# EAGLE board n64rgb2moutfilter_nutzen (EAGLE 9.5.2)
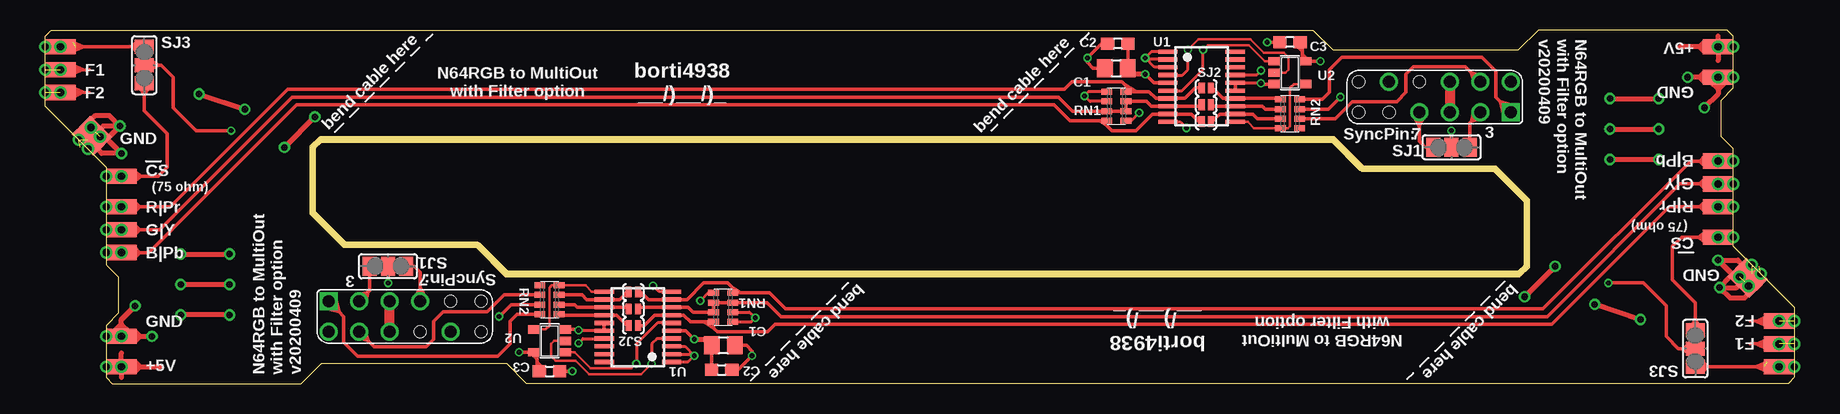
[diagram p0: board, top side]
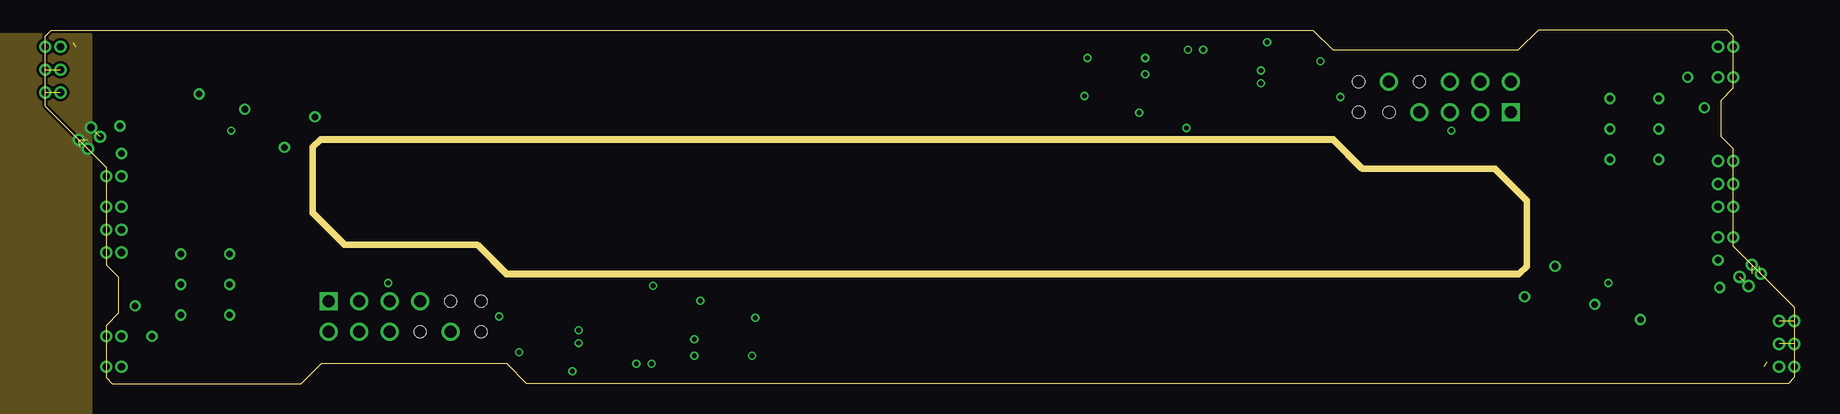
[diagram p1: board, inner layer Route2]
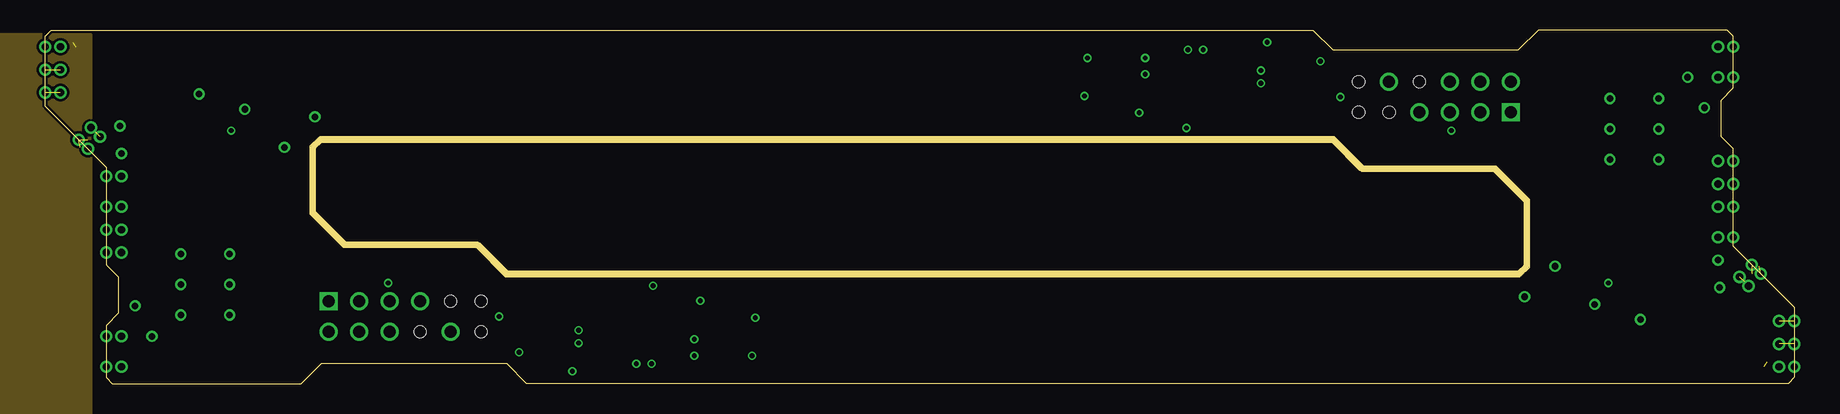
[diagram p2: board, inner layer Route15]
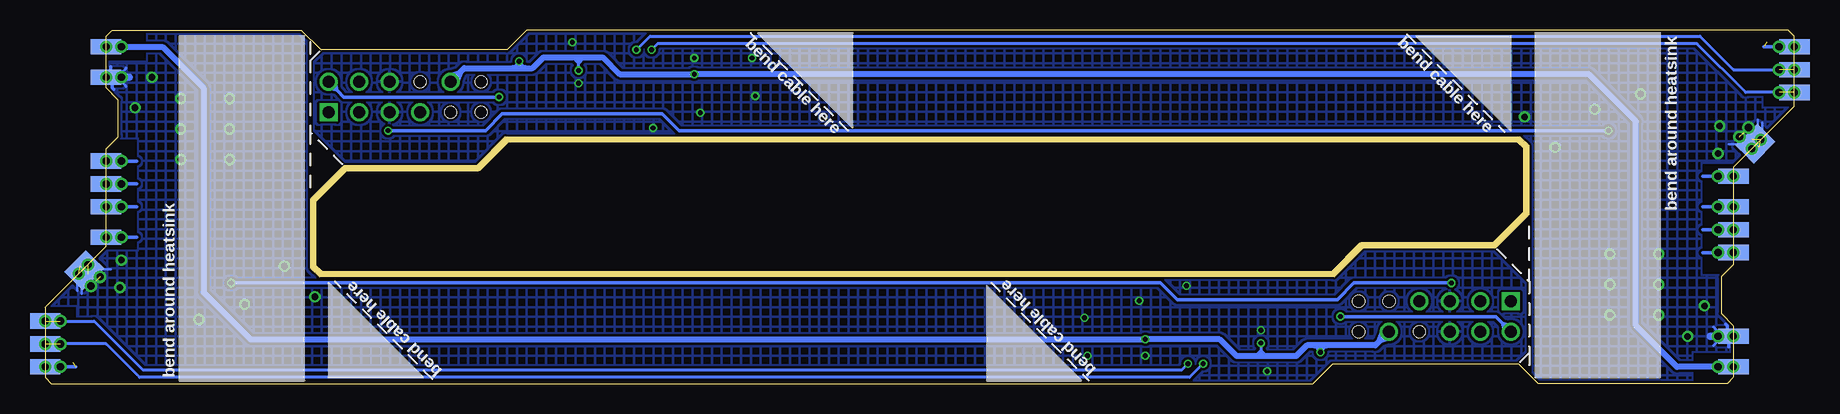
[diagram p3: board, bottom side, seen from below]

Size 145.8 x 29.46 mm. Coordinates in mm from the lower left corner, seen from the top.
Outline: 0,23.11 5.08,18.03 5.08,9.91 6.1,8.89 6.1,5.84 5.08,4.83 5.08,0.51 5.59,0 21.34,0 22.99,1.65 38.48,1.65 40.13,0 145.29,0 145.8,0.51 145.8,6.35 140.72,11.43 140.72,19.56 139.7,20.57 139.7,23.62 140.72,24.64 140.72,28.96 140.21,29.46 124.46,29.46 122.81,27.81 107.31,27.81 105.66,29.46 0.51,29.46 0,28.96 0,23.11
Outline: 22.1,14.1 22.1,19.81 22.86,20.57 107.44,20.57 109.86,18.16 120.9,18.16 123.7,15.37 123.7,9.65 122.94,8.89 38.35,8.89 35.94,11.3 24.89,11.3 22.1,14.1
Copper layers (1*16): Top 0.018mm / dielectric 1.55mm / Bottom 0.018mm
Design rules "fpc": minimum track width 0.1mm, minimum drill 0.2mm, track to track 0.2mm, track to pad 0.2mm, pad to pad 0.2mm, via to via 0.2mm, smd to smd 0mil, copper to edge 0.2mm, drill to drill 0.2mm, minimum pad ring 0.125mm, minimum via ring 0.1mm, stop-mask expansion 2mil, vias tented up to drill 1mm, thermal gap 0.2mm
bRestrict: area 5.1,-0.3 to 8.4,2.5; area 5.1,9.1 to 7.6,18.3; area 0,23.1 to 2.5,32.3; area 137.4,26.9 to 140.7,29.7; area 138.2,11.2 to 140.7,20.3; area 143.3,-2.8 to 145.8,6.4; 10 lines
Milling: 12 lines

## Footprints (pad centres in the part's own frame; a part is rotated, then mirrored left to right if it is on the bottom)
SMD1,27-2,54 = smd 1.27 x 2.54: 1 0,0
C0805 = smd 1.3 x 1.5: 1 -0.95,0; 2 0.95,0
C0603 = smd 1.1 x 1: 1 -0.85,0; 2 0.85,0
SNES_MULTIAV_RGBSY = drill 1 square: 1 6.35,-1.27 | drill 1: 2 6.35,1.27; 3 3.81,-1.27; 4 3.81,1.27; 5 1.27,-1.27; 6 1.27,1.27; 7 -1.27,-1.27; 10 -3.81,1.27 | hole 1: -3.81,-1.27; -6.35,-1.27; -6.35,1.27; -1.27,1.27
CTS742C083 = smd 0.5 x 0.9: 1 -1.2,-0.8; 2 -0.4,-0.8; 3 0.4,-0.8; 4 1.2,-0.8; 5 1.2,0.8; 6 0.4,0.8; 7 -0.4,0.8; 8 -1.2,0.8
SJ_2 = smd 1.168 x 1.6: 1 -1.524,0; 2 0,0; 3 1.524,0
SJ_SMALL = smd 0.508 x 0.889: 1 -0.381,0; 2 0.381,0
THS7368 = smd 1.6 x 0.35: 1 -2.8,2.895; 2 -2.8,2.245; 3 -2.8,1.595; 4 -2.8,0.945; 5 -2.8,0.295; 6 -2.8,-0.355; 7 -2.8,-1.005; 8 -2.8,-1.655; 9 -2.8,-2.305; 10 -2.8,-2.955; 11 2.8,-2.955; 12 2.8,-2.305; 13 2.8,-1.655; 14 2.8,-1.005; 15 2.8,-0.355; 16 2.8,0.295; 17 2.8,0.945; 18 2.8,1.595; 19 2.8,2.245; 20 2.8,2.895
SOT23-5 = smd 0.69 x 0.99: 1 -0.95,-1.29; 2 0,-1.29; 3 0.95,-1.29; 4 0.95,1.3; 5 -0.95,1.3

## Placement (x,y rotation side)
B/PB  [SMD1,27-2,54]  6.35,10.92 90 top
B/PB1  [SMD1,27-2,54]  5.08,10.92 90 bottom
B/PB2  [SMD1,27-2,54]  139.45,18.54 270 top
B/PB3  [SMD1,27-2,54]  140.72,18.54 270 bottom
C1  22u  [C0805]  89.28,26.29 0 top
C2  0.1u  [C0603]  89.41,28.32 180 top
C3  0.1u  [C0603]  103.76,28.45 180 top
C4  22u  [C0805]  56.52,3.17 180 top
C5  0.1u  [C0603]  56.39,1.14 0 top
C6  0.1u  [C0603]  42.04,1.02 0 top
CS75#  [SMD1,27-2,54]  6.35,17.27 90 top
CS75#1  [SMD1,27-2,54]  5.08,17.27 90 bottom
CS75#2  [SMD1,27-2,54]  139.45,12.19 270 top
CS75#3  [SMD1,27-2,54]  140.72,12.19 270 bottom
CS#  [SMD1,27-2,54]  0,28.07 90 bottom
CS#1  [SMD1,27-2,54]  1.27,28.07 90 top
CS#2  [SMD1,27-2,54]  145.8,1.4 270 bottom
CS#3  [SMD1,27-2,54]  144.53,1.4 270 top
E$1  [SNES_MULTIAV_RGBSY]  115.82,23.88 0 top
E$2  [SNES_MULTIAV_RGBSY]  29.97,5.59 180 top
F1  [SMD1,27-2,54]  0,26.16 90 bottom
F2  [SMD1,27-2,54]  0,24.26 90 bottom
F3  [SMD1,27-2,54]  1.27,24.26 90 top
F4  [SMD1,27-2,54]  1.27,26.16 90 top
F5  [SMD1,27-2,54]  145.8,3.3 270 bottom
F6  [SMD1,27-2,54]  145.8,5.21 270 bottom
F7  [SMD1,27-2,54]  144.53,5.21 270 top
F8  [SMD1,27-2,54]  144.53,3.3 270 top
G/Y  [SMD1,27-2,54]  6.35,12.83 90 top
G/Y1  [SMD1,27-2,54]  5.08,12.83 90 bottom
G/Y2  [SMD1,27-2,54]  139.45,16.64 270 top
G/Y3  [SMD1,27-2,54]  140.72,16.64 270 bottom
P_GND1  [SMD1,27-2,54]  5.08,3.94 90 bottom
P_GND2  [SMD1,27-2,54]  6.35,3.94 90 top
P_GND3  [SMD1,27-2,54]  4.19,20.96 45 top
P_GND4  [SMD1,27-2,54]  3.56,20.32 45 top
P_GND5  [SMD1,27-2,54]  2.92,19.69 315 bottom
P_GND6  [SMD1,27-2,54]  3.56,20.32 315 bottom
P_GND7  [SMD1,27-2,54]  139.45,25.53 270 top
P_GND8  [SMD1,27-2,54]  141.6,8.51 225 top
P_GND9  [SMD1,27-2,54]  142.24,9.14 225 top
P_GND10  [SMD1,27-2,54]  140.72,25.53 270 bottom
P_GND11  [SMD1,27-2,54]  142.88,9.78 135 bottom
P_GND12  [SMD1,27-2,54]  142.24,9.14 135 bottom
P_VCC_5V  [SMD1,27-2,54]  6.35,1.4 90 top
P_VCC_5V1  [SMD1,27-2,54]  5.08,1.4 90 bottom
P_VCC_5V2  [SMD1,27-2,54]  139.45,28.07 270 top
P_VCC_5V3  [SMD1,27-2,54]  140.72,28.07 270 bottom
R/PR  [SMD1,27-2,54]  6.35,14.73 90 top
R/PR1  [SMD1,27-2,54]  5.08,14.73 90 bottom
R/PR2  [SMD1,27-2,54]  139.45,14.73 270 top
R/PR3  [SMD1,27-2,54]  140.72,14.73 270 bottom
RN1  75  [CTS742C083]  89.28,23.11 90 top
RN2  75  [CTS742C083]  103.76,22.48 270 top
RN3  75  [CTS742C083]  56.52,6.35 270 top
RN4  75  [CTS742C083]  42.04,6.99 90 top
SJ1  [SJ_2]  117.22,19.69 180 top
SJ2  [SJ_2]  28.57,9.78 0 top
SJ2B  [SJ_SMALL]  96.77,24.64 0 top
SJ2B1  [SJ_SMALL]  49.02,4.83 180 top
SJ2G  [SJ_SMALL]  96.77,23.24 0 top
SJ2G1  [SJ_SMALL]  49.02,6.22 180 top
SJ2R  [SJ_SMALL]  96.77,21.84 0 top
SJ2R1  [SJ_SMALL]  49.02,7.62 180 top
SJ3  [SJ_2]  8.26,26.54 270 top
SJ4  [SJ_2]  137.54,2.92 90 top
U1  [THS7368]  96.39,24.77 0 top
U2  [SOT23-5]  103.76,25.91 270 top
U3  [THS7368]  49.4,4.7 180 top
U4  [SOT23-5]  42.04,3.56 90 top

## Library data of the parts
B/PB B/PB1-B/PB3 CS75# CS75#1-CS75#3 CS# CS#1-CS#3 F1-F8 G/Y G/Y1-G/Y3 P_GND1-P_GND3 P_GND7 P_GND8 P_GND10 P_VCC_5V P_VCC_5V1-P_VCC_5V3 R/PR R/PR1-R/PR3 = wirepad@1
C1-C6 = rcl
E$1 E$2 U1 U3 = snes_div
P_GND4-P_GND6 P_GND9 P_GND11 P_GND12 = wirepad
RN1-RN4 = resistor-net
SJ1 SJ2 SJ2B SJ2B1 SJ2G SJ2G1 SJ2R SJ2R1 SJ3 SJ4 = jumper
U2 U4 = 74xx-little-de

## Nets
5V: C1.2 C2.1 C3.1 E$1.10 P_VCC_5V1.1 P_VCC_5V.1 U1.5 U1.17 U2.5
5V1: C4.2 C5.1 C6.1 E$2.10 P_VCC_5V2.1 P_VCC_5V3.1 U3.5 U3.17 U4.5
#CS: E$1.3 SJ1.1
#CS1: E$2.3 SJ2.1
#CS.75.I: CS75#1.1 CS75#.1 SJ3.3
#CS.75.I1: CS75#2.1 CS75#3.1 SJ4.3
#CS.I: CS#1.1 CS#.1 SJ3.1
#CS.I1: CS#2.1 CS#3.1 SJ4.1
#CS.SEL: SJ1.2 SJ3.2
#CS.SEL1: SJ2.2 SJ4.2
BLUE: B/PB1.1 B/PB.1 RN1.8 SJ2R.1 U1.9
BLUE1: B/PB2.1 B/PB3.1 RN3.8 SJ2R1.1 U3.9
BLUE.OUT: RN2.3 SJ2R.2 U1.12
BLUE.OUT1: RN4.3 SJ2R1.2 U3.12
BLUE.OUT.1: E$2.4 RN4.6
BLUE.OUT.75: E$1.4 RN2.6
BYPASS_SF: RN2.4 U1.11 U2.4
BYPASS_SF1: RN4.4 U3.11 U4.4
F1: F1.1 F4.1 U1.6 U2.1
F2: F2.1 F3.1 U1.4 U2.2
F3: F5.1 F8.1 U3.6 U4.1
F4: F6.1 F7.1 U3.4 U4.2
GND: C1.1 C2.2 C3.2 E$1.5 E$1.6 P_GND1.1 P_GND2.1 P_GND3.1 P_GND4.1 P_GND5.1 P_GND6.1 RN1.1 RN1.5 RN1.6 U1.1 U1.2 U1.3 U1.10 U1.15 U1.16 U2.3
GND1: C4.1 C5.2 C6.2 E$2.5 E$2.6 P_GND7.1 P_GND8.1 P_GND9.1 P_GND10.1 P_GND11.1 P_GND12.1 RN3.1 RN3.5 RN3.6 U3.1 U3.2 U3.3 U3.10 U3.15 U3.16 U4.3
GREEN: G/Y1.1 G/Y.1 RN1.2 RN1.3 RN1.7 SJ2G.1 U1.8
GREEN1: G/Y2.1 G/Y3.1 RN3.2 RN3.3 RN3.7 SJ2G1.1 U3.8
GREEN.OUT: RN2.2 SJ2G.2 U1.13
GREEN.OUT1: RN4.2 SJ2G1.2 U3.13
GREEN.OUT.1: E$2.2 RN4.7
GREEN.OUT.75: E$1.2 RN2.7
LUMA: E$1.7 SJ1.3
LUMA1: E$2.7 SJ2.3
RED: R/PR1.1 R/PR.1 RN1.4 SJ2B.1 U1.7
RED1: R/PR2.1 R/PR3.1 RN3.4 SJ2B1.1 U3.7
RED1.OUT: RN2.1 SJ2B.2 U1.14
RED1.OUT1: RN4.1 SJ2B1.2 U3.14
RED.OUT.1: E$2.1 RN4.8
RED.OUT.75: E$1.1 RN2.8

## Tracks (layer width: path | path; a pad name or v marks a point on that pad's centre or on a via)
5V  (via drill 0.4, 0.6)
  Top 0.254: v101.35,26.09 100.97,25.71 U1.17
  Top 0.305: C1.2 90.23,26.47 90.26,26.5 C2.1 | U1.5 92.42,25.06 v91.69,25.78 | v106.3,26.85 U2.5 104.78,27.14 104.78,27.43 | C3.1 104.78,28.28 104.78,27.69 | 104.78,27.43 104.78,27.69 | 104.78,27.69 104.27,28.19 | 104.78,27.43 105.28,26.92
  Top 0.406: P_VCC_5V.1 7.87,1.4 | 7.49,1.78 7.87,1.4 | 7.87,1.4 7.49,1.02 | 5.48,1.4 P_VCC_5V.1 | 7.87,1.4 9.53,1.4 | P_VCC_5V.1 6.35,2.54 | P_VCC_5V.1 6.35,0.51 | v91.69,25.78 90.74,25.78 C1.2
  Bottom 0.254: 101.35,26.67 101.35,27.18 | 101.35,26.67 100.84,27.18 | v101.35,26.09 101.35,26.67 | 101.35,26.67 101.85,27.18
  Bottom 0.305: 111,26.16 111.51,24.89 | 111.12,26.04 112.27,25.65 | 105.79,26.29 106.3,26.8 106.81,26.29 | v106.3,26.85 106.3,26.29
  Bottom 0.406: P_VCC_5V1.1 P_VCC_5V.1
  Bottom 0.508: P_VCC_5V.1 9.78,1.4 13.21,4.83 13.21,21.84 17.14,25.78 v91.69,25.78 97.92,25.78 99.31,27.18 100.84,27.18 101.35,27.18 101.85,27.18 104.27,27.18 105.16,26.29 105.79,26.29 106.3,26.29 106.81,26.29 110.87,26.29 111,26.16 111.12,26.04 E$1.10
  other vias: 5.08,1.4 6.35,1.4
5V1  (via drill 0.4, 0.6)
  Top 0.254: v44.45,3.37 44.83,3.75 U3.17
  Top 0.305: C4.2 55.56,3 55.54,2.97 C5.1 | U3.5 53.38,4.4 v54.1,3.68 | v39.5,2.61 U4.5 41.02,2.32 41.02,2.03 | C6.1 41.02,1.18 41.02,1.78 | 41.02,2.03 41.02,1.78 | 41.02,1.78 41.53,1.27 | 41.02,2.03 40.51,2.54
  Top 0.406: P_VCC_5V2.1 137.92,28.07 | 138.3,27.69 137.92,28.07 | 137.92,28.07 138.3,28.45 | 140.31,28.07 P_VCC_5V2.1 | 137.92,28.07 136.27,28.07 | P_VCC_5V2.1 139.45,26.92 | P_VCC_5V2.1 139.45,28.96 | v54.1,3.68 55.06,3.68 C4.2
  Bottom 0.254: 44.45,2.79 44.45,2.29 | 44.45,2.79 44.96,2.29 | v44.45,3.37 44.45,2.79 | 44.45,2.79 43.94,2.29
  Bottom 0.305: 34.8,3.3 34.29,4.57 | 34.67,3.43 33.53,3.81 | 40.01,3.17 39.5,2.67 38.99,3.17 | v39.5,2.61 39.5,3.17
  Bottom 0.406: P_VCC_5V3.1 P_VCC_5V2.1
  Bottom 0.508: P_VCC_5V2.1 136.02,28.07 132.59,24.64 132.59,7.62 128.65,3.68 v54.1,3.68 47.88,3.68 46.48,2.29 44.96,2.29 44.45,2.29 43.94,2.29 41.53,2.29 40.64,3.17 40.01,3.17 39.5,3.17 38.99,3.17 34.92,3.17 34.8,3.3 34.67,3.43 E$2.10
  other vias: 140.72,28.07 139.45,28.07
#CS
  Top 0.254: 119.89,22.1 118.87,21.84 119.13,22.86
  Top 0.305: E$1.3 118.87,21.84 118.75,21.72 SJ1.1
#CS1
  Top 0.254: 25.91,7.37 26.92,7.62 26.67,6.6
  Top 0.305: E$2.3 26.92,7.62 27.05,7.75 SJ2.1
#CS.75.I  (via drill 0.6)
  Top 0.305: CS75#1.1 CS75#.1 8,17.27 | 8,17.27 9.4,17.27 10.16,18.03 10.16,20.83 8.26,22.73 8.26,24.13 | 8,17.27 7.49,17.65 | 8,17.27 7.49,16.89 | 8.26,24.13 SJ3.3 | 8.26,24.13 8.76,24.89 | 8.26,24.13 7.75,24.89
  Bottom 0.305: CS75#1.1 7.62,17.27
  other vias: 5.08,17.27 6.35,17.27
#CS.75.I1  (via drill 0.6)
  Top 0.305: CS75#3.1 CS75#2.1 137.79,12.19 | 137.79,12.19 136.4,12.19 135.64,11.43 135.64,8.64 137.54,6.73 137.54,5.33 | 137.79,12.19 138.3,11.81 | 137.79,12.19 138.3,12.57 | 137.54,5.33 SJ4.3 | 137.54,5.33 137.03,4.57 | 137.54,5.33 138.05,4.57
  Bottom 0.305: CS75#3.1 138.18,12.19
  other vias: 140.72,12.19 139.45,12.19
#CS.I  (via drill 0.6)  (1 unrouted)
  Top 0.254: CS#1.1 3.17,28.07
  Top 0.305: 3.17,28.07 2.29,27.69 | 3.17,28.07 2.29,28.45 | 3.17,28.07 7.11,28.07 | 7.11,28.07 SJ3.1 | 7.11,28.07 7.62,28.45 | 7.11,28.07 7.62,27.69
  Bottom 0.203: -0.36,27.71 CS#.1
  Bottom 0.305: CS#.1 2.54,28.07
  other vias: 0,28.07 1.27,28.07
#CS.I1  (via drill 0.6)  (1 unrouted)
  Top 0.254: CS#3.1 142.62,1.4
  Top 0.305: 142.62,1.4 143.51,1.78 | 142.62,1.4 143.51,1.02 | 142.62,1.4 138.68,1.4 | 138.68,1.4 SJ4.1 | 138.68,1.4 138.18,1.02 | 138.68,1.4 138.18,1.78
  Bottom 0.203: 146.16,1.76 CS#2.1
  Bottom 0.305: CS#2.1 143.26,1.4
  other vias: 145.8,1.4 144.53,1.4
#CS.SEL  (via drill 0.4)
  Top 0.305: SJ1.2 v117.22,21.08 | v15.49,21.08 12.57,21.08 10.67,22.99 10.67,25.53 9.65,26.54 9.4,26.54 | 9.4,26.54 SJ3.2 | 9.4,26.54 8.76,26.16 | 9.4,26.54 8.76,26.92
  Bottom 0.305: v117.22,21.08 109.09,21.08 107.7,22.48 94.36,22.48 92.96,21.08 v15.49,21.08
#CS.SEL1  (via drill 0.4)
  Top 0.305: SJ2.2 v28.57,8.38 | v130.3,8.38 133.22,8.38 135.13,6.48 135.13,3.94 136.14,2.92 136.4,2.92 | 136.4,2.92 SJ4.2 | 136.4,2.92 137.03,3.3 | 136.4,2.92 137.03,2.54
  Bottom 0.305: v28.57,8.38 36.7,8.38 38.1,6.99 51.44,6.99 52.83,8.38 v130.3,8.38
+5V
  pour Route15 (rank 3): -22.86,29.08 -22.86,24.26 -22.1,23.5 -17.02,23.5 -16.51,22.99 -16.51,17.4 -16,16.89 -14.22,16.89 -9.14,11.81 -9.14,8.76 -9.65,8.25 -13.21,8.25 -13.72,7.75 -13.72,1.91 -13.21,1.4 -7.37,1.4 -6.86,0.89 -6.86,-2.92 -6.1,-3.68 3.81,-3.68 3.81,29.08
BLUE  (via drill 0.6)
  Top 0.254: 96.39,22.1 SJ2R.1
  Top 0.305: 7.87,10.92 B/PB.1 B/PB1.1 | 7.49,11.3 7.87,10.92 | 7.87,10.92 7.49,10.54 | 7.87,10.92 8.64,10.92 20.95,23.24 84.07,23.24 85.4,21.91 87.88,21.91 | 95.89,22.1 95.52,22.46 U1.9 92.31,22.46 90.93,21.08 88.9,21.08 88.48,21.5 | 95.89,22.1 96.39,22.1 | 87.88,21.91 RN1.8 88.48,21.5 | 87.88,21.91 88.48,21.5 | 95.89,22.1 96.39,21.59
  Bottom 0.305: B/PB1.1 7.62,10.92
  other vias: 5.08,10.92 6.35,10.92
BLUE1  (via drill 0.6)
  Top 0.254: 49.4,7.37 SJ2R1.1
  Top 0.305: 137.92,18.54 B/PB2.1 B/PB3.1 | 138.3,18.16 137.92,18.54 | 137.92,18.54 138.3,18.92 | 137.92,18.54 137.16,18.54 124.84,6.22 61.72,6.22 60.4,7.55 57.91,7.55 | 49.91,7.37 50.27,7 U3.9 53.49,7 54.86,8.38 56.9,8.38 57.31,7.96 | 49.91,7.37 49.4,7.37 | 57.91,7.55 RN3.8 57.31,7.96 | 57.91,7.55 57.31,7.96 | 49.91,7.37 49.4,7.87
  Bottom 0.305: B/PB3.1 138.18,18.54
  other vias: 140.72,18.54 139.45,18.54
BLUE.OUT
  Top 0.254: 97.16,22.1 SJ2R.2 | 97.54,22.1
  Top 0.305: 97.54,22.1 97.91,22.46 U1.12 100.67,22.46 101.05,22.08 RN2.3 | 97.16,22.1 97.54,22.1 97.16,21.59
BLUE.OUT1
  Top 0.254: 48.64,7.37 SJ2R1.2 | 48.25,7.37 48.26,7.37
  Top 0.305: 48.25,7.37 47.89,7 U3.12 45.12,7 44.74,7.38 RN4.3 | 48.64,7.37 48.26,7.37 48.64,7.87
BLUE.OUT.1
  Top 0.305: 26.92,3.56 27.43,3.05 31.75,3.05 32.38,3.68 32.38,5.21 33.15,5.97 36.83,5.97 38.25,7.38 RN4.6 | 26.92,3.56 E$2.4 | 26.92,3.56 25.78,3.94 | 26.92,3.56 26.54,4.7
BLUE.OUT.75
  Top 0.305: 118.87,25.91 118.36,26.42 114.05,26.42 113.41,25.78 113.41,24.26 112.65,23.5 108.97,23.5 107.55,22.08 RN2.6 | 118.87,25.91 E$1.4 | 118.87,25.91 120.02,25.53 | 118.87,25.91 119.25,24.77
BYPASS_SF
  Top 0.203: U1.11 100.24,21.81 100.77,21.28 RN2.4 103.58,21.28 103.76,21.46 103.76,24.64 104.08,24.96 U2.4
BYPASS_SF1
  Top 0.203: U3.11 45.56,7.65 45.03,8.18 RN4.4 42.22,8.18 42.04,8 42.04,4.83 41.72,4.51 U4.4
F1  (via drill 0.4, 0.6)  (1 unrouted)
  Top 0.203: v96.52,27.81 96.9,28.19 100.33,28.19 101.67,26.86 U2.1
  Top 0.254: F4.1 2.67,26.16 | 2.67,26.16 3.17,26.16 | 3.17,26.16 2.29,25.78 | 3.17,26.16 2.29,26.54 | U1.6 94.77,24.41 96.52,26.16 v96.52,27.81 | 3.17,26.16 3.68,26.16 | 2.67,26.16 2.54,26.04 2.54,26.29
  Bottom 0.254: v96.52,27.81 95.38,28.96 7.87,28.96 5.08,26.16 F1.1
  other vias: 0,26.16
F2  (via drill 0.4, 0.6)  (1 unrouted)
  Top 0.203: v95.25,27.81 96.14,28.7 100.46,28.7 101.6,27.56 103.25,27.56 103.63,27.18 103.63,26.16 103.38,25.91 U2.2
  Top 0.254: F3.1 2.67,24.26 | 2.67,24.26 3.17,24.26 | 3.17,24.26 2.29,24.64 | 3.17,24.26 2.41,23.88 | 3.17,24.26 3.68,24.26 | 2.67,24.26 2.54,24 | 2.67,24.26 2.54,24.38 | 94.29,25.71 U1.4 94.8,25.71 95.25,26.16 v95.25,27.81
  Bottom 0.254: v95.25,27.81 94.74,28.32 8.13,28.32 4.06,24.26 F2.1
  other vias: 0,24.26
F3  (via drill 0.4, 0.6)  (1 unrouted)
  Top 0.203: v49.28,1.65 48.9,1.27 45.47,1.27 44.13,2.61 U4.1
  Top 0.254: F8.1 143.13,3.3 | 143.13,3.3 142.62,3.3 | 142.62,3.3 143.51,3.68 | 142.62,3.3 143.51,2.92 | U3.6 51.03,5.05 49.28,3.3 v49.28,1.65 | 142.62,3.3 142.11,3.3 | 143.13,3.3 143.26,3.43 143.26,3.17
  Bottom 0.254: v49.28,1.65 50.42,0.51 137.92,0.51 140.72,3.3 F5.1
  other vias: 145.8,3.3
F4  (via drill 0.4, 0.6)  (1 unrouted)
  Top 0.203: v50.55,1.65 49.66,0.76 45.34,0.76 44.2,1.91 42.55,1.91 42.16,2.29 42.16,3.3 42.42,3.56 U4.2
  Top 0.254: F7.1 143.13,5.21 | 143.13,5.21 142.62,5.21 | 142.62,5.21 143.51,4.83 | 142.62,5.21 143.38,5.59 | 142.62,5.21 142.11,5.21 | 143.13,5.21 143.26,5.46 | 143.13,5.21 143.26,5.08 | 51.51,3.75 U3.4 51,3.75 50.55,3.3 v50.55,1.65
  Bottom 0.254: v50.55,1.65 51.05,1.14 137.67,1.14 141.73,5.21 F6.1
  other vias: 145.8,5.21
GND  (via drill 0.4, 0.55, 0.6)  (3 unrouted)
  Top 0.254: v91.69,27.14 91.82,27.01 U1.2 | U1.1 92.22,27.66 v91.69,27.14 | U1.3 92.47,26.36 v91.69,27.14 | U1.10 94.61,21.81 v95.12,21.3 | RN1.1 90.53,21.91 v91.19,22.57 | RN1.5 86.96,24.31 86.63,23.99 | 86.63,23.99 v86.61,23.97 | RN1.6 87.1,23.51 86.63,23.99 | v101.35,25.02 101.31,25.06 U1.16
  Top 0.305: P_GND2.1 P_GND1.1 | C2.2 88.05,28.32 v86.87,27.14 86.87,26.76 87.33,26.29 C1.1 | U1.16 U1.15 | U2.3 101.41,24.96 v101.35,25.02 | v101.85,28.45 C3.2
  Top 0.406: 7.87,3.94 P_GND2.1 6.35,4.95 | 7.87,3.94 v8.89,3.94 | 6.35,4.95 6.35,5.33 v7.49,6.48 | 6.35,4.95 6.99,4.32 | 6.35,4.95 5.71,4.32 | 7.49,4.32 7.87,3.94 | 7.87,3.94 7.49,3.56 | v6.22,21.46 4.83,21.46 4.57,21.21 v4.57,20.57 | 3.68,20.19 4.7,19.18 v6.35,19.18 4.95,20.57 | 3.68,20.19 P_GND6.1 4.32,20.32 v4.57,20.57 | 4.95,20.57 v4.57,20.57 | v6.22,21.46 5.33,20.57 4.95,20.57 | v6.22,21.46 5.36,22.33 4.17,22.33 3.68,21.84 3.68,20.19 | v11.3,10.79 v15.37,10.79 | v15.37,8.25 v11.3,8.25 | v15.37,5.71 v11.3,5.71 | v22.48,22.23 v19.94,19.69 | v12.83,24.13 v16.64,22.86
  Top 0.813: E$1.6 E$1.5
  Bottom 0.203: 2.67,21.72 2.67,21.21 3.05,20.83 | 3.05,20.83 P_GND6.1 | 5.46,19.94 3.94,19.94 P_GND6.1 | P_GND6.1 3.56,21.46 3.68,21.59 | 4.83,20.32 P_GND6.1 | 3.05,20.83 3.05,21.97
  Bottom 0.254: 6.73,4.7 6.35,4.32 P_GND2.1 6.35,3.56 6.73,3.17
  Bottom 0.305: P_GND2.1 5.59,3.94 | 5.59,3.94 5.59,4.83 5.71,4.95 | 5.59,3.94 5.46,3.81 5.46,3.05
  Bottom 0.406: v4.57,20.57 3.94,19.94 | P_GND5.1 3.43,19.69 v3.56,19.56
  Bottom 0.61: P_GND2.1 6.99,3.94
  other vias: 5.08,3.94 6.35,3.94 2.79,20.32 3.81,21.34
  pour Route2 (rank 2): -62.23,-9.02 3.81,-9.02 3.81,29.08 -62.23,29.08
  pour Bottom (hatched): 0,29.46 123.83,29.46 123.83,17.53 22.1,17.53 22.1,0 5.08,0 5.08,18.03 0,23.11
GND1  (via drill 0.4, 0.55, 0.6)  (3 unrouted)
  Top 0.254: v54.1,2.33 53.98,2.45 U3.2 | U3.1 53.58,1.8 v54.1,2.33 | U3.3 53.33,3.1 v54.1,2.33 | U3.10 51.18,7.65 v50.67,8.16 | RN3.1 55.27,7.55 v54.61,6.89 | RN3.5 58.84,5.15 59.16,5.48 | 59.16,5.48 v59.18,5.5 | RN3.6 58.69,5.95 59.16,5.48 | v44.45,4.45 44.49,4.4 U3.16
  Top 0.305: P_GND7.1 P_GND10.1 | C5.2 57.74,1.14 v58.93,2.33 58.93,2.71 58.46,3.17 C4.1 | U3.16 U3.15 | U4.3 44.39,4.51 v44.45,4.45 | v43.94,1.02 C6.2
  Top 0.406: 137.92,25.53 P_GND7.1 139.45,24.51 | 137.92,25.53 v136.91,25.53 | 139.45,24.51 139.45,24.13 v138.3,22.99 | 139.45,24.51 138.81,25.15 | 139.45,24.51 140.08,25.15 | 138.3,25.15 137.92,25.53 | 137.92,25.53 138.3,25.91 | v139.57,8 140.97,8 141.22,8.25 v141.22,8.89 | 142.11,9.27 141.1,10.29 v139.45,10.29 140.84,8.89 | 142.11,9.27 P_GND12.1 141.48,9.14 v141.22,8.89 | 140.84,8.89 v141.22,8.89 | v139.57,8 140.46,8.89 140.84,8.89 | v139.57,8 140.44,7.13 141.63,7.13 142.11,7.62 142.11,9.27 | v134.49,18.67 v130.43,18.67 | v130.43,21.21 v134.49,21.21 | v130.43,23.75 v134.49,23.75 | v123.32,7.24 v125.86,9.78 | v132.97,5.33 v129.16,6.6
  Top 0.813: E$2.6 E$2.5
  Bottom 0.203: 143.13,7.75 143.13,8.25 142.75,8.64 | 142.75,8.64 P_GND12.1 | 140.34,9.52 141.86,9.52 P_GND12.1 | P_GND12.1 142.24,8 142.11,7.87 | 140.97,9.14 P_GND12.1 | 142.75,8.64 142.75,7.49
  Bottom 0.254: 139.06,24.77 139.45,25.15 P_GND7.1 139.45,25.91 139.06,26.29
  Bottom 0.305: P_GND7.1 140.21,25.53 | 140.21,25.53 140.21,24.64 140.08,24.51 | 140.21,25.53 140.34,25.65 140.34,26.42
  Bottom 0.406: v141.22,8.89 141.86,9.52 | P_GND11.1 142.37,9.78 v142.24,9.91
  Bottom 0.61: P_GND7.1 138.81,25.53
  other vias: 140.72,25.53 139.45,25.53 143,9.14 141.99,8.13
  pour Bottom (hatched): 145.8,0 21.97,0 21.97,11.94 123.7,11.94 123.7,29.46 140.72,29.46 140.72,11.43 145.8,6.35
GREEN  (via drill 0.6)
  Top 0.305: 7.87,12.83 G/Y.1 G/Y1.1 | 7.49,12.45 7.87,12.83 | 7.49,13.21 7.87,12.83 | 7.87,12.83 9.53,12.83 20.57,23.88 84.45,23.88 85.62,22.71 RN1.7 RN1.2 RN1.3 91.8,23.51 92.21,23.11 U1.8 96.26,23.11 SJ2G.1
  Bottom 0.305: G/Y1.1 7.62,12.83
  other vias: 5.08,12.83 6.35,12.83
GREEN1  (via drill 0.6)
  Top 0.305: 137.92,16.64 G/Y2.1 G/Y3.1 | 138.3,17.02 137.92,16.64 | 138.3,16.26 137.92,16.64 | 137.92,16.64 136.27,16.64 125.22,5.59 61.34,5.59 60.18,6.75 RN3.7 RN3.2 RN3.3 53.99,5.95 53.59,6.35 U3.8 49.53,6.35 SJ2G1.1
  Bottom 0.305: G/Y3.1 138.18,16.64
  other vias: 140.72,16.64 139.45,16.64
GREEN.OUT
  Top 0.305: SJ2G.2 97.16,23.11 U1.13 101.46,23.11 101.69,22.88 RN2.2
GREEN.OUT1
  Top 0.305: SJ2G1.2 48.64,6.35 U3.13 44.34,6.35 44.11,6.58 RN4.2
GREEN.OUT.1  (via drill 0.4)
  Top 0.305: v37.85,5.59 38.84,6.58 RN4.7
  Bottom 0.254: 23.37,4.83 24.38,5.08 24.13,4.06
  Bottom 0.305: E$2.2 24.38,5.08 24.89,5.59 v37.85,5.59
GREEN.OUT.75  (via drill 0.4)
  Top 0.305: v107.95,23.88 106.95,22.88 RN2.7
  Bottom 0.254: 122.43,24.64 121.41,24.38 121.67,25.4
  Bottom 0.305: E$1.2 121.41,24.38 120.9,23.88 v107.95,23.88
LUMA
  Top 0.254: 114.05,22.35 114.55,21.46 115.06,22.35
  Top 0.305: E$1.7 114.55,21.46 114.55,20.19 115.06,19.69 SJ1.3
LUMA1
  Top 0.254: 31.75,7.11 31.24,8 30.73,7.11
  Top 0.305: E$2.7 31.24,8 31.24,9.27 30.73,9.78 SJ2.3
RED  (via drill 0.6)
  Top 0.305: 7.87,14.73 R/PR.1 R/PR1.1 | 7.49,14.35 7.87,14.73 | 7.87,14.73 7.49,15.11 | U1.7 92.95,23.76 | 7.87,14.73 10.41,14.73 20.19,24.51 84.96,24.51 85.6,25.15 89.76,25.15 90.03,24.88 | U1.7 95.01,23.76 95.89,24.64 SJ2B.1 | 90.03,24.88 90.08,24.82 RN1.4 90.93,24.31 | U1.7 92.57,23.76 92.02,24.31 90.93,24.31 | 90.03,24.88 90.93,24.31
  Bottom 0.305: R/PR1.1 7.62,14.73
  other vias: 5.08,14.73 6.35,14.73
RED1  (via drill 0.6)
  Top 0.305: 137.92,14.73 R/PR2.1 R/PR3.1 | 138.3,15.11 137.92,14.73 | 137.92,14.73 138.3,14.35 | U3.7 52.84,5.7 | 137.92,14.73 135.38,14.73 125.6,4.95 60.83,4.95 60.2,4.32 56.04,4.32 55.77,4.59 | U3.7 50.79,5.7 49.91,4.83 SJ2B1.1 | 55.77,4.59 55.72,4.64 RN3.4 54.86,5.15 | U3.7 53.22,5.7 53.78,5.15 54.86,5.15 | 55.77,4.59 54.86,5.15
  Bottom 0.305: R/PR3.1 138.18,14.73
  other vias: 140.72,14.73 139.45,14.73
RED1.OUT
  Top 0.305: 97.54,24.38 98.16,23.76 U1.14 102.88,23.76 RN2.1 | 97.54,24.38 97.16,24.38 SJ2B.2 | 97.54,24.38 97.16,24.77
RED1.OUT1
  Top 0.305: 48.26,5.08 47.64,5.7 U3.14 42.92,5.7 RN4.1 | 48.26,5.08 48.64,5.08 SJ2B1.2 | 48.26,5.08 48.64,4.7
RED.OUT.1
  Top 0.305: 24.51,5.97 24.89,5.59 24.89,3.43 26.04,2.29 37.72,2.29 38.73,3.3 38.73,5.19 39.33,5.79 RN4.8 | 24.51,5.97 E$2.1 | 24.51,5.97 23.11,6.35 | 24.51,5.97 24.13,7.37
RED.OUT.75
  Top 0.305: 121.28,23.5 120.9,23.88 120.9,26.04 119.76,27.18 108.08,27.18 107.06,26.16 107.06,24.28 106.46,23.68 RN2.8 | 121.28,23.5 E$1.1 | 121.28,23.5 122.68,23.11 | 121.28,23.5 121.67,22.1
S$1  (via drill 0.6)
  other vias: 144.53,3.3
S$2  (via drill 0.6)
  other vias: 1.27,26.16
S$3  (via drill 0.6)
  other vias: 1.27,24.26
S$5  (via drill 0.6)
  other vias: 144.53,5.21
VCCIO
  pour Route15 (rank 4): -52.45,29.08 -52.45,24.26 -49.28,24.26 -49.28,29.08 3.81,29.08 3.81,-9.02 -62.23,-9.02 -62.23,29.08

## Text on the board
tPlace: bend cable here | bend cable here | bend cable here | bend cable here
bPlace: bend cable here | bend cable here | bend cable here | bend cable here
tNames: N64RGB to MultiOut / with Filter option / v20200409 | +5V | F1 | SJ2 | N64RGB to MultiOut / with Filter option | borti4938 / __/)__/)_ | GND | F2 | 3 | GND | SyncPin: | 7 | B|Pb | CS | G|Y | (75 ohm) | R|Pr | R|Pr | (75 ohm) | G|Y | CS | B|Pb | SJ1 | GND | 3 | 7 | SyncPin: | RN2 | RN1 | F2 | GND | U2 | SJ2 | C1 | borti4938 / __/)__/)_ | N64RGB to MultiOut / with Filter option | F1 | C3 | U1 | SJ3 | +5V | N64RGB to MultiOut / with Filter option / v20200409 | C2
bNames: bend around heatsink | bend around heatsink
tDocu: Flex-PCB (c) 2019, 2020 Peter Bartmann